# EAGLE board Sensor de Umidade do Solo (EAGLE 9.7.0)

Size 201.69 x 116.31 mm. Coordinates in mm from the lower left corner, seen from the top.
Outline: 0,0 201.69,0 201.69,116.31 0,116.31 0,0
Copper layers (1*16): Top 0.035mm / dielectric 1.5mm / Bottom 0.035mm
Design rules "default": minimum track width 6mil, minimum drill 0.35mm, track to track 6mil, track to pad 6mil, pad to pad 6mil, via to via 6mil, smd to smd 6mil, copper to edge 40mil, drill to drill 6mil, minimum pad ring 10mil, minimum via ring 8mil, stop-mask expansion 4mil, vias tented up to drill 0mil, thermal gap 10mil

## Footprints (pad centres in the part's own frame; a part is rotated, then mirrored left to right if it is on the bottom)
LEDRD254W60D565H860B_G = drill 0.981 pad 1.581: 1 -1.27,0; 2 1.27,0
LEDRD254W60D565H860B_Y = drill 0.981 pad 1.581: 1 -1.27,0; 2 1.27,0
LEDRD254W60D565H860B = drill 0.981 pad 1.581: 1 -1.27,0; 2 1.27,0
LEDRD254W60D565H860B_B = drill 0.981 pad 1.581: 1 -1.27,0; 2 1.27,0
LU-5-R = drill 0.8: 1 -6.35,-3.81; 5 3.81,-3.81; 6 6.35,-3.81; 7 6.35,3.81; 8 3.81,3.81; 12 -6.35,3.81
1X02 = drill 1.016 long: 1 -1.27,0; 2 1.27,0
BATTERY-GENERIC = drill 1.118 pad 3.15 octagon: + 2.54,0; - -2.54,0
TO220V = drill 1.016 long: 1 -2.54,-2.54; 2 0,-2.54; 3 2.54,-2.54
RESAD1016W63L850D250B = drill 0.83 pad 1.43: 1 -5.08,0; 2 5.08,0
HA-06-SM065 = drill 1 pad 1.676: 1 -2.54,-2.54; 2 0,2.54; 3 2.54,-2.54
ARDUINO-UNO-R3-SHIELD = drill 1.016 pad 1.88: 3.3V 24.13,-2.54; 5V 24.13,0; A0 24.13,12.7; A1 24.13,15.24; A2 24.13,17.78; A3 24.13,20.32; A4 24.13,22.86; A5 24.13,25.4; AREF -24.13,-13.97; D2 -24.13,20.32; D3 -24.13,17.78; D4 -24.13,15.24; D5 -24.13,12.7; D6 -24.13,10.16; D7 -24.13,7.62; D8 -24.13,3.81; D9 -24.13,1.27; D10 -24.13,-1.27; D11 -24.13,-3.81; D12 -24.13,-6.35; D13 -24.13,-8.89; GND@0 24.13,2.54; GND@1 24.13,5.08; GND@2 -24.13,-11.43; IOREF 24.13,-7.62; NC 24.13,-10.16; RES 24.13,-5.08; RX -24.13,25.4; SCL -24.13,-19.05; SDA -24.13,-16.51; TX -24.13,22.86; VIN 24.13,7.62
JHD-162A = drill 1.016 long: 1 -19.05,0; 2 -16.51,0; 3 -13.97,0; 4 -11.43,0; 5 -8.89,0; 6 -6.35,0; 7 -3.81,0; 8 -1.27,0; 9 1.27,0; 10 3.81,0; 11 6.35,0; 12 8.89,0; 13 11.43,0; 14 13.97,0; 15 16.51,0; 16 19.05,0
DIP762W60P254L712H480Q6B = drill 0.85 pad 1.45: 1 -3.81,2.54; 2 -3.81,0; 3 -3.81,-2.54; 4 3.81,-2.54; 5 3.81,0; 6 3.81,2.54

## Placement (x,y rotation side)
D1  GREEN  [LEDRD254W60D565H860B_G]  169.61,108.4 180 top
D2  YELLOW  [LEDRD254W60D565H860B_Y]  176.8,108.19 180 top
D4  RED  [LEDRD254W60D565H860B]  184.4,107.76 180 top
D5  BLUE  [LEDRD254W60D565H860B_B]  191.16,107.13 180 top
K1  RELAY-SPDT_LU-5-R  [LU-5-R]  190.77,23.11 180 top
L1  LIGHTBULB  [1X02]  195.85,37.08 0 top
P1  BATTERYGENERIC  [BATTERY-GENERIC]  128.2,8.26 180 top
Q2  TIP120_TO220-V  [TO220V]  176.8,37.08 0 top
R1  300  [RESAD1016W63L850D250B]  161.56,16.76 0 top
R4  100  [RESAD1016W63L850D250B]  118.86,101.41 90 top
R5  220  [RESAD1016W63L850D250B]  151.88,101.41 90 top
R7  200  [RESAD1016W63L850D250B]  154.42,101.41 90 top
RPOT1  250k  [HA-06-SM065]  102.78,18.73 0 top
U1  ARDUINO-UNO-R3-SHIELD  [ARDUINO-UNO-R3-SHIELD]  47.88,76.28 270 top
U2  LCD-16X2JHD-162A  [JHD-162A]  132.83,91.38 0 top
U3  4N3525  [DIP762W60P254L712H480Q6B]  166.64,23.11 90 top

## Library data of the parts
D1 = Tinkercad; CATEGORY: Opto-Electronic; SUB-CATEGORY: LED; VALUE: LED_GREEN
D2 = Tinkercad; CATEGORY: Opto-Electronic; SUB-CATEGORY: LED; VALUE: LED_YELLOW
D4 = Tinkercad; CATEGORY: Opto-Electronic; SUB-CATEGORY: LED; VALUE: LED_RED
D5 = Tinkercad; CATEGORY: Opto-Electronic; SUB-CATEGORY: LED; VALUE: LED_BLUE
K1 L1 P1 Q2 R1 R4 R5 R7 RPOT1 U1 U2 = Tinkercad
U3 = Tinkercad; CATEGORY: Opto-Electronic; DESCRIPTION: Optoisolator Transistor with Base Output 5000Vrms Channel 6-DIP; MANUFACTURER: Vishay; MPN: 4N25; OPERATING_TEMP: - 55°C to + 100 °C; PART_STATUS: Active; ROHS_COMPLIANT: COMPLIANT; SERIES: 4N2x; SUB-CATEGORY: Optocoupler; THERMALLOSS: 0.150 W

## Nets
D5_C: D1.2 D2.2 D4.2 D5.2 R7.1
L1_2: K1.1 K1.12 L1.2
P1+: K1.5 K1.6 P1.+ U3.5
P1-: L1.1 P1.- Q2.3 R1.1 R4.2 R5.2 R7.2 RPOT1.1 U1.GND@0 U1.GND@1 U1.GND@2 U2.1 U2.5
Q2_C: K1.8 Q2.2
U1_5V: RPOT1.3 U1.5V U2.2 U2.15
U1_A1: RPOT1.2 U1.A1
U1_D2: U1.D2 U2.14
U1_D3: U1.D3 U2.13
U1_D4: U1.D4 U2.12
U1_D5: U1.D5 U2.11
U1_D6: D5.1 U1.D6
U1_D7: U1.D7 U3.1
U1_D8: D4.1 U1.D8
U1_D9: D2.1 U1.D9
U1_D10: D1.1 U1.D10
U1_D12: U1.D12 U2.6
U1_D13: U1.D13 U2.4
U2_LED-: R5.1 U2.16
U2_VO: R4.1 U2.3
U3_C1: R1.2 U3.2
U3_E: Q2.1 U3.4

## Tracks (layer width: path | path; a pad name or v marks a point on that pad's centre or on a via)
D5_C  (4 unrouted)
L1_2  (2 unrouted)
P1+  (3 unrouted)
P1-  (12 unrouted)
Q2_C  (1 unrouted)
U1_5V  (3 unrouted)
U1_A1  (1 unrouted)
U1_D2  (1 unrouted)
U1_D3  (1 unrouted)
U1_D4  (1 unrouted)
U1_D5  (1 unrouted)
U1_D6  (1 unrouted)
U1_D7  (1 unrouted)
U1_D8  (1 unrouted)
U1_D9  (1 unrouted)
U1_D10  (1 unrouted)
U1_D12  (1 unrouted)
U1_D13  (1 unrouted)
U2_LED-  (1 unrouted)
U2_VO  (1 unrouted)
U3_C1  (1 unrouted)
U3_E  (1 unrouted)